# Altium PCB PCB1.PcbDoc
Units mm, origin at the board's own origin, x right, y up, seen from the top; angles counter-clockwise.
Board outline 32.7 x 17.9 mm, 2 copper layers (Top Layer, Bottom Layer); 7 components, 7 nets, 26 pads, 9 vias.
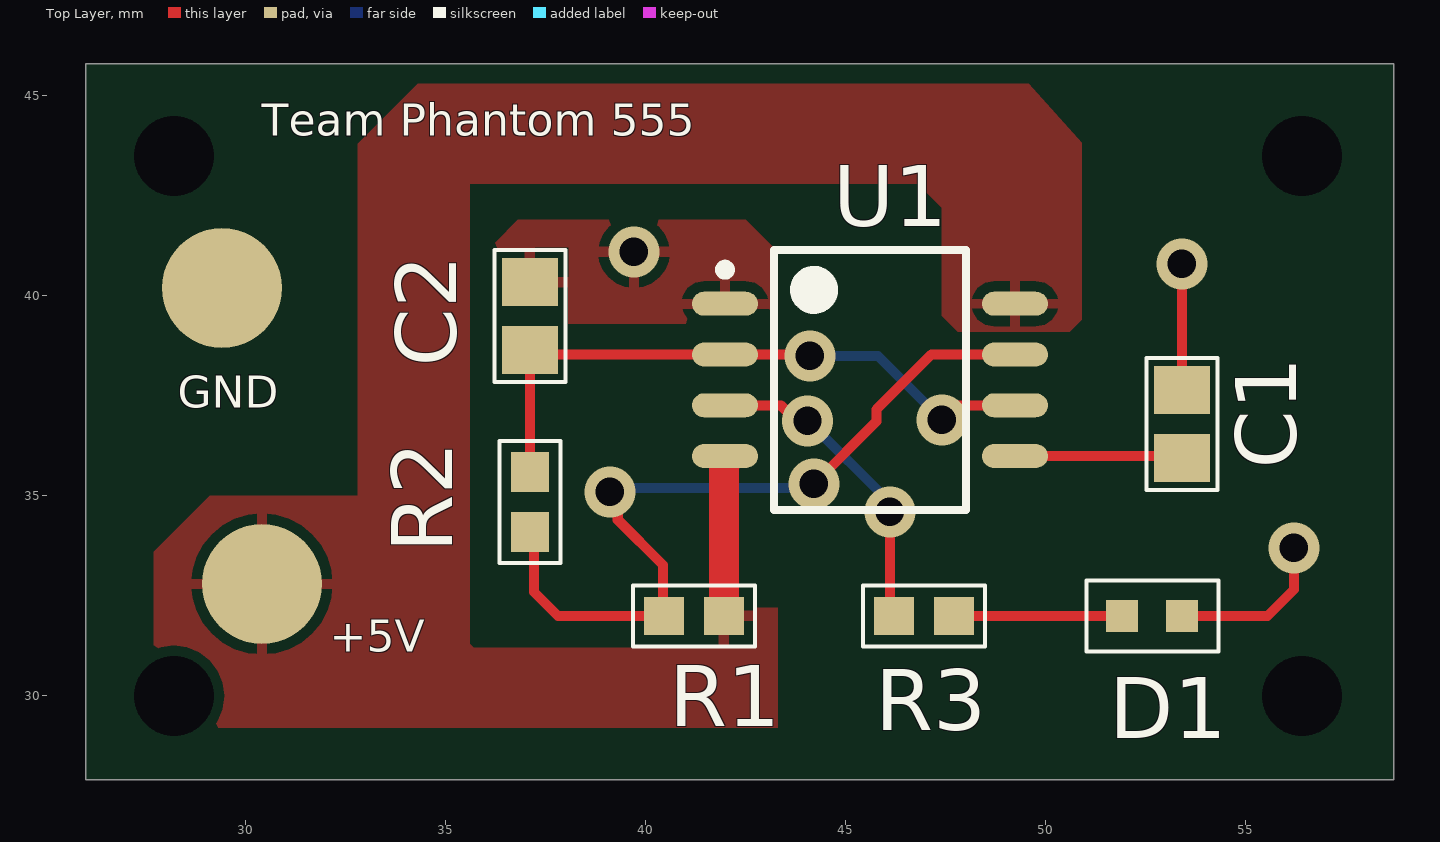
[diagram p0: Top Layer view]
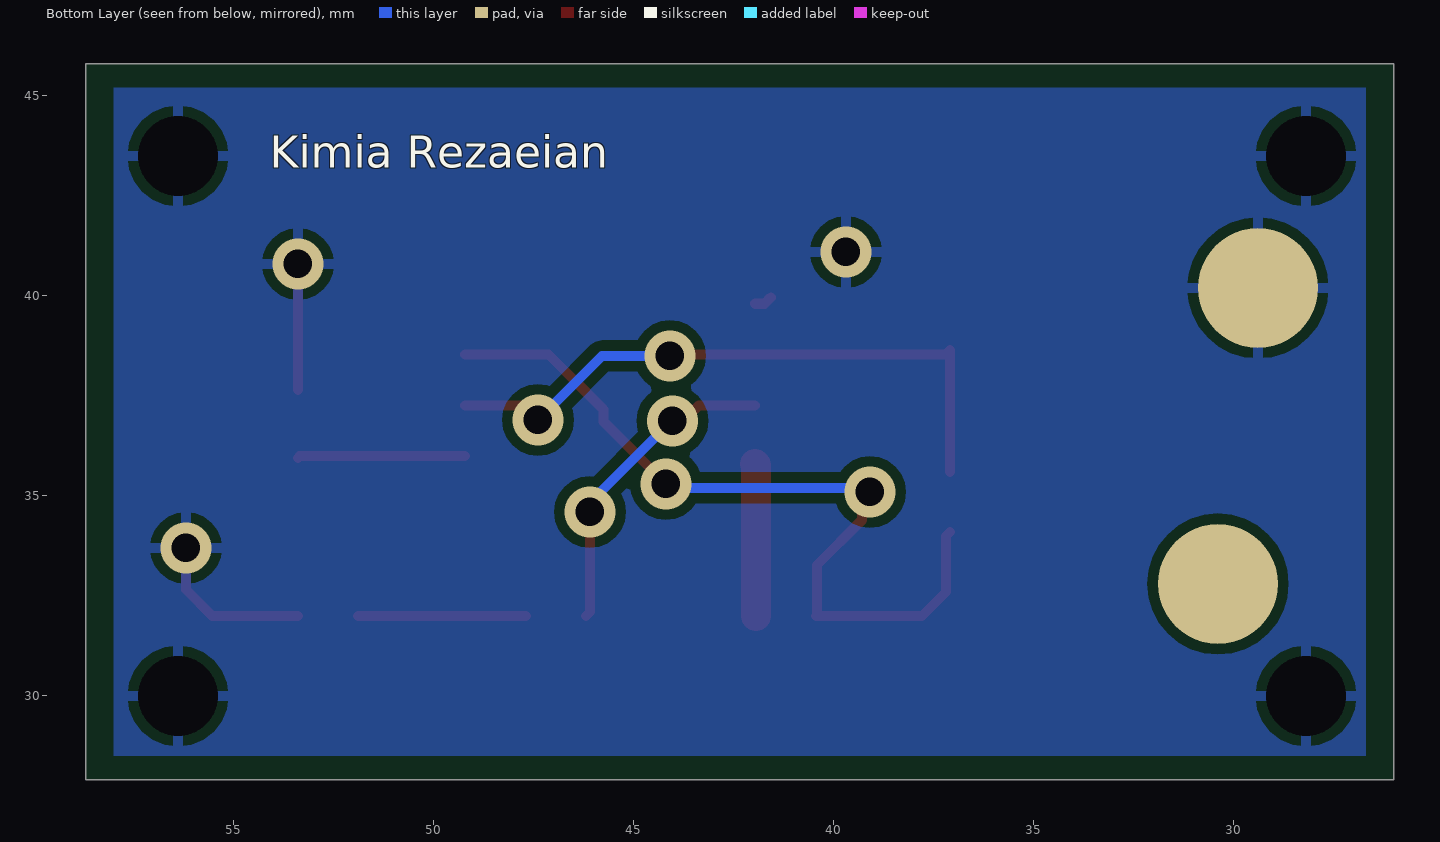
[diagram p1: Bottom Layer view, seen from below]

## Layer stack, top to bottom
Top Solder: solder mask 0.0102, Solder Resist, Dk 3.5
Top Layer: signal copper 0.0356
Dielectric 1: dielectric 0.32, FR-4, Dk 4.8
Bottom Layer: signal copper 0.0356
Bottom Solder: solder mask 0.0102, Solder Resist, Dk 3.5

## Board outline
26,27.9 58.7,27.9 58.7,45.8 26,45.8

## Design rules (kind name [scope] priority, off if disabled: settings)
Clearance [All] p1: gap=0.254 ignorepadtopadclearanceinfootprint=FALSE except(0: Arc-Hole Track-Hole SMDPad-Hole THPad-Hole Via-Hole Fill-Hole Poly-Hole Region-Hole Text-Hole)
PolygonConnect [All] p1: connectstyle=Relief reliefconductorwidth=0.254 reliefentries=4 polygonreliefangle="90 Angle" airgapwidth=0.254
RoutingVias [All] p1: holewidth=0.711 width=1.27 viastyle="Through Hole" minholewidth=0.711 minwidth=1.27 maxholewidth=0.711 maxwidth=1.27
SolderMaskExpansion [All] p1: expansion=0.102
Width [All] p1: maxlimit=0.254 minlimit=0.254 preferedwidth=0.254
30 further rules are at their usual default settings.

## Components (designator, comment, footprint, x,y, rotation, side; value= is the part's Value field where it differs from the comment)
C1 "10nF" C603 53.4,36.8 r270 top
C2 "10uF" C603 37.1,39.5 r270 top
D1 "Green" LED_0603 51.9,32 r0 top
R1 "1k" R0603 41.2,32 r180 top
R2 "10k" R0603 37.1,34.85 r270 top
R3 "1k" R0603 46.95,32 r180 top
U1 "NE555PSRE4" SOIC-8 45.6,37.9 r0 top

## Footprints (in the part's own frame and the unit in brackets; to place one, negate y for a bottom-side part, rotate by r counter-clockwise, add the part's x,y. Pads: shape width x height; smd on the part's side, far side on the other; paste and mask are expansions set on the pad)
C603 [mm] "Chip Capacitor, 2-Leads, Body 2.00x1.25mm, IPC Medium Density"
  rect 1.2x1.4 smd: 1(-0.85,0) 2(0.85,0)
  silkscreen extent -1.65,-0.89 1.65,0.89, body extent -1.05,-0.67 1.05,0.67, height 1.35
LED_0603 [mm]
  rect 0.8x0.8 smd: 1(0,0) 2(1.5,0)
  silkscreen extent -0.89,-0.89 2.41,0.89
R0603 [mm] "Chip Capacitor, 2-Leads, Body 1.60x0.80mm, IPC Medium Density"
  rect 1x0.95 smd: 1(-0.75,0) 2(0.75,0)
  silkscreen extent -1.52,-0.76 1.52,0.76, body extent -0.85,-0.45 0.85,0.45, height 0.55
SOIC-8 [mm] "SOIC, 8-Leads, Body 6.20x5.30mm, Pitch 1.27mm, IPC Medium Density"
  oval 1.65x0.6 smd: 1(-3.625,1.905) 2(-3.625,0.635) 3(-3.625,-0.635) 4(-3.625,-1.905) 5(3.625,-1.905) 6(3.625,-0.635) 7(3.625,0.635) 8(3.625,1.905)
  silkscreen extent -3.75,-3.25 2.4,3.25, body extent -2.8,-3.25 2.8,3.25, height 1.75

## Part data
C1: library part CC0603KRX7R6BB103, "Cap Ceramic 0.01uF 10V X7R 10% SMD 0603 125C Paper T/R", Case/Package=0603, Dielectric=X7R, Manufacturer=Yageo, Max Operating Temperature=125°C, Min Operating Temperature=-55°C, Resistor Type=Ceramic, Supplier Part Number 1=311-4054-1-ND, Tolerance=10%, Voltage Rating=10V, Capacitance=10nF, Category="Ceramic Capacitors", ComponentLink1Description=https://datasheet.ciiva.com/11586/upy-gphc-x7r-6-3v-to-50v-8-11586326.pdf?src-supplier=Avnet, ComponentLink1URL=https://datasheet.ciiva.com/11586/upy-gphc-x7r-6-3v-to-50v-8-11586326.pdf?src-supplier=Avnet, ComponentLink2Description=https://datasheet.ciiva.com/17434/upy-gphc-x7r-6-3v-to-50v-8-17434572.pdf?src-supplier=Avnet+Europe, ComponentLink2URL=https://datasheet.ciiva.com/17434/upy-gphc-x7r-6-3v-to-50v-8-17434572.pdf?src-supplier=Avnet+Europe, Construction=Flat, Depth=0.8mm, Halogen Free="Halogen Free", Height=0.8mm, Lead Free="Lead Free", Length=0.063inch, Manufacturer Part Number=CC0603KRX7R6BB103, Mount="Surface Mount", Packaging="Tape and Reel", Pricing 1="1=0.10000, 10=0.05500, 50=0.02980, 100=0.02430, 500=0.01738, 1000=0.01366 (USD)", Radiation Hardening=No, RoHS=Yes, RoHS Compliant=Yes, Series=CC, Stock 1=8229, Supplier 1=Digi-Key, Thickness=0.035inch, Voltage Rating (DC)=10V, Width=0.031inch
C2: library part GRM21BC81A106KE18L, "CAPACITOR, 0805, X6S, 10V, 10UF", Case Code (Imperial)=0805, Case Code (Metric)=2012, Dielectric=X6S, Manufacturer=Murata, Max Operating Temperature=105°C, Min Operating Temperature=-55°C, Package Quantity=3000, Supplier Part Number 1=490-6466-1-ND, Tolerance=10%, Voltage=10V, Capacitance=10uF, Case/Package=0805, Category="Ceramic Capacitors", ComponentLink1Description=https://datasheet.ciiva.com/11607/product-11607527.pdf?src-supplier=Avnet, ComponentLink1URL=https://datasheet.ciiva.com/11607/product-11607527.pdf?src-supplier=Avnet, ComponentLink2Description=https://datasheet.ciiva.com/25613/0900766b81023a1e-25613080.pdf?src-supplier=RSComponents, ComponentLink2URL=https://datasheet.ciiva.com/25613/0900766b81023a1e-25613080.pdf?src-supplier=RSComponents, ComponentLink3Description=https://datasheet.ciiva.com/22774/608985-22774383.pdf?src-supplier=Farnell, ComponentLink3URL=https://datasheet.ciiva.com/22774/608985-22774383.pdf?src-supplier=Farnell, ComponentLink4Description=https://datasheet.ciiva.com/6270/partnumbering-e-01-6270411.pdf?src-supplier=Digi-Key, ComponentLink4URL=https://datasheet.ciiva.com/6270/partnumbering-e-01-6270411.pdf?src-supplier=Digi-Key, ComponentLink5Description=https://datasheet.ciiva.com/6270/partnumbering-e-01-6270413.pdf?src-supplier=Digi-Key, ComponentLink5URL=https://datasheet.ciiva.com/6270/partnumbering-e-01-6270413.pdf?src-supplier=Digi-Key, ComponentLink6Description=https://datasheet.ciiva.com/6270/partnumbering-e-01-6270414.pdf?src-supplier=Digi-Key, ComponentLink6URL=https://datasheet.ciiva.com/6270/partnumbering-e-01-6270414.pdf?src-supplier=Digi-Key, ComponentLink7Description=https://datasheet.ciiva.com/5411/product-5411868.pdf?src-supplier=Mouser, ComponentLink7URL=https://datasheet.ciiva.com/5411/product-5411868.pdf?src-supplier=Mouser, ComponentLink8Description=https://datasheet.ciiva.com/7719/608985-7719070.pdf?src-supplier=Element14, ComponentLink8URL=https://datasheet.ciiva.com/7719/608985-7719070.pdf?src-supplier=Element14, Construction=Flat, Depth=1.25mm, Height=1.25mm, Lead Free="Lead Free", Length=2mm, Manufacturer Part Number=GRM21BC81A106KE18L, Material=Ceramic, Mount="Surface Mount", Packaging="Tape and Reel", Pricing 1="1=0.26000, 10=0.17800, 50=0.11860, 100=0.10090, 500=0.07120, 1000=0.06231 (USD)", Radiation Hardening=No, REACH SVHC="No SVHC", RoHS=Yes, RoHS Compliant=Yes, Series=GRM, Stock 1=10862, Supplier 1=Digi-Key, Termination=SMD/SMT, Thickness=0.053inch, Voltage Rating=10V, Voltage Rating (DC)=10V, Width=1.25mm
D1: library part LTST-C171GKT, "Green 0805 130 º Min 5 mcd Typical 12 mcd Water Clear Lens SMT LED", Case Code (Imperial)=0805, Case Code (Metric)=2012, Forward Current=30mA, Forward Voltage=2.1V, Lens Color=Colorless, Manufacturer="Vishay Lite-On", Max Operating Temperature=85°C, Min Operating Temperature=-55°C, Package Quantity=1, Power Dissipation=100mW, Reverse Voltage=5V, Supplier Part Number 1=160-1423-2-ND, Test Current=10mA, Case/Package=0805, Category=LEDs, Color=Green, ComponentLink1Description=https://datasheet.ciiva.com/12400/lite-on-ltst-c171gkt-190133-12400647.pdf?src-supplier=Mouser, ComponentLink1URL=https://datasheet.ciiva.com/12400/lite-on-ltst-c171gkt-190133-12400647.pdf?src-supplier=Mouser, ComponentLink2Description=https://datasheet.ciiva.com/2110/ltst-c171gkt-2110000.pdf?src-supplier=Digi-Key, ComponentLink2URL=https://datasheet.ciiva.com/2110/ltst-c171gkt-2110000.pdf?src-supplier=Digi-Key, ComponentLink3Description=https://datasheet.ciiva.com/11773/0900766b80dc0296-11773991.pdf?src-supplier=RSComponents, ComponentLink3URL=https://datasheet.ciiva.com/11773/0900766b80dc0296-11773991.pdf?src-supplier=RSComponents, ComponentLink4Description=https://datasheet.ciiva.com/2110/ltst-c171gkt-2110001.pdf?src-supplier=Digi-Key, ComponentLink4URL=https://datasheet.ciiva.com/2110/ltst-c171gkt-2110001.pdf?src-supplier=Digi-Key, ComponentLink5Description=https://datasheet.ciiva.com/2110/ltst-c171gkt-2110002.pdf?src-supplier=Digi-Key, ComponentLink5URL=https://datasheet.ciiva.com/2110/ltst-c171gkt-2110002.pdf?src-supplier=Digi-Key, ComponentLink6Description=https://datasheet.ciiva.com/16396/ltst-c171gkt-16396549.pdf?src-supplier=Future+Electronics, ComponentLink6URL=https://datasheet.ciiva.com/16396/ltst-c171gkt-16396549.pdf?src-supplier=Future+Electronics, Depth=1.25mm, Dominant Wavelength=569nm, Height=0.8mm, Illumination Color=Green, Lead Free="Lead Free", Length=2mm, Lens Style=Diffused,Colorless,Rectangular,Clear, Lens Transparency=Clear, Luminous Intensity=12mcd, Manufacturer Part Number=LTST-C171GKT, Mount="Surface Mount", Number of Elements=1, Number of LEDs=1, Number of Pins=2, Packaging="Tape and Reel", Power Rating=100mW, Pricing 1="3000=0.04646, 6000=0.04040, 15000=0.03636, 30000=0.03232, 75000=0.02929 (USD)", Radiation Hardening=No, RoHS=Yes, RoHS Compliant=Yes, Series="CHIPLED 0805", Stock 1=90000, Supplier 1=Digi-Key, Viewing Angle=130°, Wavelength=585nm, Width=1.25mm
R1 R3: library part ESR03EZPJ102, "ROHM - ESR03EZPJ102 - SMD Chip Resistor, Anti-Surge, 0603 [1608 Metric], 1 kohm, ESR Series, 150 V, Thick Film, 250 mW", Case Code (Imperial)=0603, Case Code (Metric)=1608, Manufacturer=Rohm, Max Operating Temperature=155°C, Max Power Dissipation=250mW, Min Operating Temperature=-55°C, Package Quantity=1, Resistance=1kR, Resistor Type="Thick Film", Supplier Part Number 1=RHM1.0KDCT-ND, Temperature Coefficient=200ppm/°C, Tolerance=5%, Case/Package=0603, Category="Chip SMD Resistors", ComponentLink1Description=https://datasheet.ciiva.com/2469/esr-2469603.pdf?src-supplier=Digi-Key, ComponentLink1URL=https://datasheet.ciiva.com/2469/esr-2469603.pdf?src-supplier=Digi-Key, ComponentLink2Description=https://datasheet.ciiva.com/2469/esr-2469604.pdf?src-supplier=Digi-Key, ComponentLink2URL=https://datasheet.ciiva.com/2469/esr-2469604.pdf?src-supplier=Digi-Key, ComponentLink3Description=https://datasheet.ciiva.com/2469/esr-2469605.pdf?src-supplier=Digi-Key, ComponentLink3URL=https://datasheet.ciiva.com/2469/esr-2469605.pdf?src-supplier=Digi-Key, Features="Automotive AEC-Q200", Height=0.022inch, Lead Free="Lead Free", Length=0.063inch, Manufacturer Part Number=ESR03EZPJ102, Number of Terminations=2, Packaging="Tape and Reel", Pricing 1="1=0.10000, 10=0.08200, 100=0.03160, 1000=0.01392, 2500=0.01202 (USD)", RoHS=Yes, RoHS Compliant=Yes, Series=ESR, Stock 1=247531, Supplier 1=Digi-Key, Width=0.031inch
R2: library part RMCF0603JT10K0, "Res Thick Film 0603 10K Ohm 5% 1/10W ±100ppm/°C Molded SMD SMD Paper T/R", Case Code (Imperial)=0603, Case Code (Metric)=1608, Manufacturer="Stackpole Electronics", Max Operating Temperature=155°C, Max Power Dissipation=100mW, Min Operating Temperature=-55°C, Resistance=10kR, Resistor Type="Thick Film", Supplier Part Number 1=RMCF0603JT10K0CT-ND, Temperature Coefficient=100ppm/°C, Tolerance=5%, Case/Package=0603, Category="Chip SMD Resistors", ComponentLink1Description=https://datasheet.ciiva.com/15193/getdatasheetpartid-364254-15193501.pdf?src-supplier=Verical, ComponentLink1URL=https://datasheet.ciiva.com/15193/getdatasheetpartid-364254-15193501.pdf?src-supplier=Verical, Construction=Rectangular, Contact Plating=Tin,Matte, Depth=0.8mm, Features="Automotive AEC-Q200", Height=0.022inch, Lead Free="Lead Free", Length=1.55mm, Manufacturer Part Number=RMCF0603JT10K0, Military Standard=Not, Mount="Surface Mount", Number of Terminations=2, Packaging="Tape and Reel", Power Rating=100mW, Pricing 1="1=0.10000, 10=0.01500, 100=0.00610, 1000=0.00274, 2500=0.00238 (USD)", Radiation Hardening=No, RoHS=Yes, Series=RMCF, Size Code=0603, Stock 1=587436, Supplier 1=Digi-Key, Width=0.031inch
U1: "IC OSC SINGLE TIMER 100KHZ 8SO", Case/Package=SOP, Frequency=100kHz, High Level Output Current=-200mA, Low Level Output Current=200mA, Manufacturer="Texas Instruments", Max Operating Temperature=70°C, Max Supply Voltage=16V, Min Operating Temperature=0°C, Min Supply Voltage=4.5V, Nominal Supply Current=2mA, Operating Supply Current=10mA, Package Quantity=2000, Quiescent Current=15mA, Supplier Part Number 1=595-NE555PSRE4, Category="Timers and Oscillators", ComponentLink1Description=https://datasheet.ciiva.com/15152/getdatasheetpartid-674139-15152742.pdf?src-supplier=Verical, ComponentLink1URL=https://datasheet.ciiva.com/15152/getdatasheetpartid-674139-15152742.pdf?src-supplier=Verical, ComponentLink2Description=https://datasheet.ciiva.com/14273/se555m-14273678.pdf?src-supplier=Avnet, ComponentLink2URL=https://datasheet.ciiva.com/14273/se555m-14273678.pdf?src-supplier=Avnet, ComponentLink3Description=https://datasheet.ciiva.com/1235/ne555-1235925.pdf?src-supplier=Digi-Key, ComponentLink3URL=https://datasheet.ciiva.com/1235/ne555-1235925.pdf?src-supplier=Digi-Key, Lead Free="Lead Free", Manufacturer Part Number=NE555PSRE4, Mount="Surface Mount", Number of Pins=8, Number of Timers/Counters=1, Packaging="Tape and Reel", Pricing 1="1=0.46000, 10=0.36900, 50=0.36900, 100=0.22800, 1000=0.14200, 10000=0.11300 (USD)", Radiation Hardening=No, RoHS=Yes, RoHS Compliant=Yes, Series=NE555, Stock 1=755, Supplier 1=Mouser, Supply Current=2mA, Weight=0.004325oz

## Free pads (board coordinates)
  round 0 hole 2 unplated: 1(28.2,43.5) 4(56.4,30) 5(56.4,43.5) 10(28.2,30)
  round 3 all layers, no hole: 1(30.4,32.8) 2(29.4,40.2)

## Via types
v1: diameter 1.27, hole 0.711, Top Layer to Bottom Layer, 9 vias

## Nets (pads, with @x,y where several pads share a name; then routed paths per layer and width w, separated by ;. In a path a pad name is that pad's centre, name@x,y a point inside that pad or via, vN(x,y) a via of type N, cw(c..) or ccw(c..) an arc to the next point about the centre after c; other vN are vias at no path point)
+5V: pad.1@30.4,32.8 R1.1 U1.4 U1.8 | length 4.2
  Top Layer w0.254: R1.1 R1.1@41.975,32.025 ; U1.4@41.975,35.8 U1.4 U1.4@42.09,35.995
  Top Layer w0.75: R1.1 41.95,35.775 U1.4@41.975,35.8
COMPARATOR: C1.2 U1.5 | length 4.2
  Top Layer w0.254: U1.5 53.355,35.995 C1.2
DISCHARGE: R1.2 R2.2 U1.7 | length 20.4
  Top Layer w0.254: R2.2 37.2,34 37.2,32.6 37.8,32 R1.2 ; v1(39.1,35.1) 39.294,34.906 39.294,34.406 40.425,33.275 R1.2@40.425,32 ; v1(44.2,35.3) 45.765,36.865 45.765,37.165 47.135,38.535 U1.7
  Bottom Layer w0.254: v1(39.1,35.1) 39.2,35.2 44.1,35.2 v1(44.2,35.3)
GND: C1.1 C2.1 D1.2 pad.1@28.2,43.5 pad.2 pad.4 pad.5 pad.10 U1.1 | length 7.7
  Top Layer w0.254: U1.1@41.577,39.965 41.737,39.805 U1.1 ; D1.2 55.541,32 56.2,32.659 v1(56.2,33.7) ; C1.1 v1(53.4,40.8)
  other v1: 39.7,41.1
LED_DRIVE: D1.1 R3.1 | length 4.2
  Top Layer w0.254: R3.1 D1.1
OUTPUT: R3.2 U1.3 | length 8
  Top Layer w0.254: U1.3 43.374,37.265 43.763,36.875 v1(44.038,36.875) ; v1(46.1,34.6) 46.1,32.1 R3.2
  Bottom Layer w0.254: v1(44.038,36.875) 44.062,36.875 46.1,34.837 v1(46.1,34.6)
TRIG: C2.2 R2.1 U1.2 U1.6 | length 16.1
  Top Layer w0.254: R2.1 C2.2 37.215,38.535 U1.2 44.065,38.535 v1(44.1,38.5) ; v1(47.4,36.9) 47.765,37.265 U1.6
  Bottom Layer w0.254: v1(44.1,38.5) 45.8,38.5 v1(47.4,36.9)

## Polygon pours and split planes (outlines as drawn)
+5V on Top Layer "+5V" (solid, pour order 14): 29.1,35 27.7,33.6 27.7,30.2 28.7,29.2 43.3,29.2 43.3,32.2 41.2,32.2 41.2,31.2 35.7,31.2 35.6,31.3 35.6,42.8 46.8,42.8 47.4,42.2 47.4,39.5 47.8,39.1 50.6,39.1 50.9,39.4 50.9,43.825 49.568,45.3 34.3,45.3 32.8,43.8 32.8,35
GND on Top Layer "GND" (solid, pour order 7): 36.8,41.9 36.1,41.2 36.1,39.8 36.6,39.3 42.9,39.3 43.3,39.7 43.3,41.2 43.2,41.2 42.5,41.9
GND on Bottom Layer "GND" (solid, pour order 5): 26.7,45.2 26.7,28.5 58,28.5 58,45.2

## Silkscreen, mask and mechanical layers (free items; w line width, h text height)
Top Overlay:
  text "Team Phantom 555" at 30.4,44 h0.8
  text "GND" at 28.3,37.2 h0.8
  text "+5V" at 32.1,31.1 h0.8
Bottom Overlay:
  text "Kimia Rezaeian" at 54.1,43.2 h0.8
Mechanical 13:
  the board outline again, w0.1